# EAGLE board Clock_Updated_3_board1 (EAGLE 7.1.0)

Size 100 x 80 mm. Coordinates in mm from the lower left corner, seen from the top.
Outline: 0,0 100,0 100,80 0,80 0,0
Copper layers (1*16): Top 0.035mm / dielectric 1.5mm / Bottom 0.035mm
Design rules "default": minimum track width 10mil, minimum drill 24mil, track to track 8mil, track to pad 8mil, pad to pad 8mil, via to via 8mil, smd to smd 8mil, copper to edge 40mil, drill to drill 8mil, minimum pad ring 10mil, minimum via ring 8mil, stop-mask expansion 4mil, vias tented up to drill 0mil, thermal gap 10mil

## Footprints (pad centres in the part's own frame; a part is rotated, then mirrored left to right if it is on the bottom)
0603-CAP = smd 1.1 x 1: 1 -0.85,0; 2 0.85,0
1206 = smd 1.6 x 1.8: 1 -1.4,0; 2 1.4,0
DCJACK_2MM_SMT = smd 2.4 x 2: GND 0,-5.5; GNDBREAK 6.2,-5.5; PWR1 0,5.5; PWR2 6.2,5.5 | hole 1.6: 0,0 | hole 1.8: 4.5,0
TO-220-ALT = drill 1.016 long: GND 0,-3.81; IN -2.54,-3.81; OUT 2.54,-3.81 | hole 3.302: 0,11.176
AVRISP = drill 0.9 pad 1.626: 1 -1.27,2.54; 2 1.27,2.54; 3 -1.27,0; 4 1.27,0; 5 -1.27,-2.54; 6 1.27,-2.54
WS2812 = smd 2 x 1.1: DI 2,0; DO 2,-1.7; LEDVDD -2,0; NC -2,1.7; VDD 2,1.7; VSS -2,-1.7
0603-RES = smd 1.1 x 1: 1 -0.85,0; 2 0.85,0
TACTILE-PTH = drill 1.016 pad 1.88: 1 -3.251,2.261; 2 3.251,2.261; 3 -3.251,-2.261; 4 3.251,-2.261
TQFP32-08 = smd 1.27 x 0.559: 1 -4.293,2.8; 2 -4.293,2; 3 -4.293,1.2; 4 -4.293,0.4; 5 -4.293,-0.4; 6 -4.293,-1.2; 7 -4.293,-2; 8 -4.293,-2.8; 17 4.293,-2.8; 18 4.293,-2; 19 4.293,-1.2; 20 4.293,-0.4; 21 4.293,0.4; 22 4.293,1.2; 23 4.293,2; 24 4.293,2.8 | smd 0.559 x 1.27: 9 -2.8,-4.293; 10 -2,-4.293; 11 -1.2,-4.293; 12 -0.4,-4.293; 13 0.4,-4.293; 14 1.2,-4.293; 15 2,-4.293; 16 2.8,-4.293; 25 2.8,4.293; 26 2,4.293; 27 1.2,4.293; 28 0.4,4.293; 29 -0.4,4.293; 30 -1.2,4.293; 31 -2,4.293; 32 -2.8,4.293
DIL08-ROUND = drill 0.813 pad 1.676: 1 -3.81,-3.81; 2 -1.27,-3.81; 3 1.27,-3.81; 4 3.81,-3.81; 5 3.81,3.81; 6 1.27,3.81; 7 -1.27,3.81; 8 -3.81,3.81
HC49UP = smd 5.334 x 1.93: 1 -4.826,0; 2 4.826,0
CRYSTAL-32KHZ-SMD = smd 2.5 x 6: SHEILD 0,5.08 | smd 1 x 2.5: X1 -1.27,0; X2 1.27,0

## Placement (x,y rotation side)
C1  0.1uF  [0603-CAP]  39.37,52.07 0 top
C2  0.1uF  [0603-CAP]  43.18,52.07 0 top
C3  0.1uF  [0603-CAP]  46.99,52.07 0 top
C4  0.1uF  [0603-CAP]  50.8,52.07 0 top
C5  0.1uF  [0603-CAP]  54.61,52.07 0 top
C6  0.1uF  [0603-CAP]  58.42,52.07 0 top
C7  0.1uF  [0603-CAP]  62.23,52.07 0 top
C8  0.1uF  [0603-CAP]  54.61,71.12 0 top
C9  0.1uF  [0603-CAP]  50.8,71.12 0 top
C10  0.1uF  [0603-CAP]  46.99,71.12 0 top
C11  0.1uF  [0603-CAP]  43.18,71.12 0 top
C12  0.1uF  [0603-CAP]  39.37,71.12 0 top
C13  22pF  [0603-CAP]  35.56,71.12 0 top
C14  22pF  [0603-CAP]  31.75,71.12 0 top
C15  10uF  [1206]  -30.48,54.61 0 top  (outside the outline)
C16  10uF  [1206]  -35.56,54.61 0 top  (outside the outline)
CN1  [DCJACK_2MM_SMT]  -35.56,7.62 0 top  (outside the outline)
IC1  [TO-220-ALT]  -19.05,6.35 0 top  (outside the outline)
ISP1  AVRISP-6  [AVRISP]  -60.96,45.72 0 top  (outside the outline)
LED1  WS2812  [WS2812]  -31.75,26.67 0 top  (outside the outline)
LED2  WS2812  [WS2812]  -40.64,26.67 0 top  (outside the outline)
LED3  WS2812  [WS2812]  -49.53,26.67 0 top  (outside the outline)
LED4  WS2812  [WS2812]  -58.42,26.67 0 top  (outside the outline)
LED5  WS2812  [WS2812]  -19.05,36.83 0 top  (outside the outline)
LED6  WS2812  [WS2812]  -27.94,36.83 0 top  (outside the outline)
LED7  WS2812  [WS2812]  -36.83,36.83 0 top  (outside the outline)
LED8  WS2812  [WS2812]  -45.72,36.83 0 top  (outside the outline)
LED9  WS2812  [WS2812]  -54.61,36.83 0 top  (outside the outline)
LED10  WS2812  [WS2812]  -63.5,36.83 0 top  (outside the outline)
LED11  WS2812  [WS2812]  -19.05,46.99 0 top  (outside the outline)
LED12  WS2812  [WS2812]  -27.94,46.99 0 top  (outside the outline)
R1  180  [0603-RES]  27.94,71.12 0 top
R2  180  [0603-RES]  24.13,71.12 0 top
R3  1  [0603-RES]  20.32,71.12 0 top
R4  1  [0603-RES]  16.51,71.12 0 top
R5  1  [0603-RES]  12.7,71.12 0 top
R6  1  [0603-RES]  8.89,71.12 0 top
R7  180  [0603-RES]  5.08,71.12 0 top
R8  180  [0603-RES]  71.12,62.23 0 top
R9  180  [0603-RES]  67.31,62.23 0 top
R10  180  [0603-RES]  63.5,62.23 0 top
R11  180  [0603-RES]  59.69,62.23 0 top
R12  180  [0603-RES]  55.88,62.23 0 top
R13  180  [0603-RES]  52.07,62.23 0 top
R14  180  [0603-RES]  48.26,62.23 0 top
R15  180  [0603-RES]  44.45,62.23 0 top
R16  180  [0603-RES]  40.64,62.23 0 top
S1  [TACTILE-PTH]  -35.56,45.72 0 top  (outside the outline)
S2  [TACTILE-PTH]  -44.45,45.72 0 top  (outside the outline)
S3  [TACTILE-PTH]  -53.34,45.72 0 top  (outside the outline)
U1  ATMEGA328P  [TQFP32-08]  15.24,19.05 0 top
U$1  DS1302  [DIL08-ROUND]  -19.05,26.67 0 top  (outside the outline)
Y1  [HC49UP]  -20.32,55.88 0 top  (outside the outline)
Y3  [CRYSTAL-32KHZ-SMD]  -53.34,2.54 0 top  (outside the outline)

## Library data of the parts
C1-C12 = SparkFun-Capacitors; PROD_ID: CAP-00810
C13 C14 = SparkFun-Capacitors; PROD_ID: CAP-07876
C15 C16 = SparkFun-Capacitors; PROD_ID: CAP-10057
CN1 ISP1 LED1-LED12 U$1 = adafruit
IC1 = SparkFun-PowerIC
R1 R2 R7-R16 = SparkFun-Resistors; PROD_ID: RES-08788
R3-R6 = SparkFun-Resistors; PROD_ID: RES-08269
S1-S3 = SparkFun-Electromechanical
U1 = SparkFun-DigitalIC; PROD_ID: IC-09069
Y1 = SparkFun-FreqCtrl
Y3 = SparkFun-FreqCtrl; PROD_ID: XTAL-07894

## Nets
GND: C1.1 C3.1 C6.1 C7.2 C8.2 C9.2 C10.2 C11.2 C12.2 C13.2 C14.2 C15.1 C16.2 CN1.GND CN1.GNDBREAK IC1.GND ISP1.6 LED1.VSS LED2.VSS LED3.VSS LED4.VSS LED5.VSS LED6.VSS LED7.VSS LED8.VSS LED9.VSS LED10.VSS LED11.VSS LED12.VSS S1.4 S2.4 S3.4 U1.3 U1.5 U$1.4
LEDPWM: LED1.DI R6.2
N$1: R6.1 U1.9
N$2: C4.2 LED5.LEDVDD R8.1
N$3: C5.2 LED6.LEDVDD R9.1
N$4: C6.2 LED7.LEDVDD R10.1
N$5: LED9.DO LED10.DI
N$6: LED10.DO LED11.DI
N$7: U$1.3 Y3.X2
N$8: U$1.2 Y3.X1
N$9: R3.2 U$1.7
N$10: R4.2 U$1.6
N$11: R5.2 U$1.5
N$12: LED4.DI LED11.DO
N$13: LED6.VDD R9.2
N$14: LED8.DO LED12.DI
N$15: C7.1 LED9.LEDVDD R11.2
N$16: LED6.DO LED7.DI
N$17: LED3.DO LED5.DI
N$18: LED5.DO LED6.DI
N$19: LED1.DO LED2.DI
N$20: LED2.DO LED3.DI
N$21: C8.1 LED10.LEDVDD
N$22: LED4.DO LED8.DI
N$23: C9.1 LED11.LEDVDD R13.2
N$24: LED12.LEDVDD R16.1
N$25: LED7.DO LED9.DI
N$26: R12.2
N$27: LED4.LEDVDD R14.1
N$28: ISP1.4 U1.15
N$29: LED8.LEDVDD R15.1
N$30: C1.2 LED1.LEDVDD R1.1
N$31: C2.2 LED2.LEDVDD R2.1
N$32: C3.2 LED3.LEDVDD R7.1
N$33: ISP1.1 U1.16
N$34: ISP1.3 U1.17
N$35: ISP1.5 U1.29
N$36: C15.2 CN1.PWR1 IC1.IN
N$38: C13.1 U1.8 Y1.1
N$39: C14.1 U1.7 Y1.2
N$40: S1.1
PIN14: R5.1 U1.10
PIN15: R4.1 U1.11
PIN16: R3.1 U1.12
POWER: C16.1 IC1.OUT U1.18 U1.20
RESET_S: S3.3 U1.2
SWITCH1: S1.3 U1.32
SWITCH2: S2.3 U1.1
VBAT: U$1.8
VCC: ISP1.2 LED1.VDD LED2.VDD LED3.VDD LED4.VDD LED5.VDD LED7.VDD LED8.VDD LED9.VDD LED10.VDD LED11.VDD LED12.VDD R8.2 R10.2 R11.1 R12.1 R13.1 R14.2 R15.2 R16.2 U1.4 U$1.1

## Tracks (layer width: path | path; a pad name or v marks a point on that pad's centre or on a via)
GND  (34 unrouted)
LEDPWM  (1 unrouted)
N$1  (1 unrouted)
N$2  (2 unrouted)
N$3  (2 unrouted)
N$4  (2 unrouted)
N$5  (1 unrouted)
N$6  (1 unrouted)
N$7  (1 unrouted)
N$8  (1 unrouted)
N$9  (1 unrouted)
N$10  (1 unrouted)
N$11  (1 unrouted)
N$12  (1 unrouted)
N$13  (1 unrouted)
N$14  (1 unrouted)
N$15  (2 unrouted)
N$16  (1 unrouted)
N$17  (1 unrouted)
N$18  (1 unrouted)
N$19  (1 unrouted)
N$20  (1 unrouted)
N$21  (1 unrouted)
N$22  (1 unrouted)
N$23  (2 unrouted)
N$24  (1 unrouted)
N$25  (1 unrouted)
N$27  (1 unrouted)
N$28  (1 unrouted)
N$29  (1 unrouted)
N$30  (2 unrouted)
N$31  (2 unrouted)
N$32  (2 unrouted)
N$33  (1 unrouted)
N$34  (1 unrouted)
N$35  (1 unrouted)
N$36  (2 unrouted)
N$38  (2 unrouted)
N$39  (2 unrouted)
PIN14  (1 unrouted)
PIN15  (1 unrouted)
PIN16  (1 unrouted)
POWER  (3 unrouted)
RESET_S  (1 unrouted)
SWITCH1  (1 unrouted)
SWITCH2  (1 unrouted)
VCC  (21 unrouted)